# Altium PCB MB1814.PcbDoc (part 2 of 6)
Units mm, origin at the board's own origin, x right, y up, seen from the top; angles counter-clockwise.
Board outline 70 x 82.5 mm, 4 copper layers (Top Layer, Signal Layer 1, Signal Layer 2, Bottom Layer), stack 1.614 mm thick; 207 components, 155 nets, 901 pads, 710 vias.
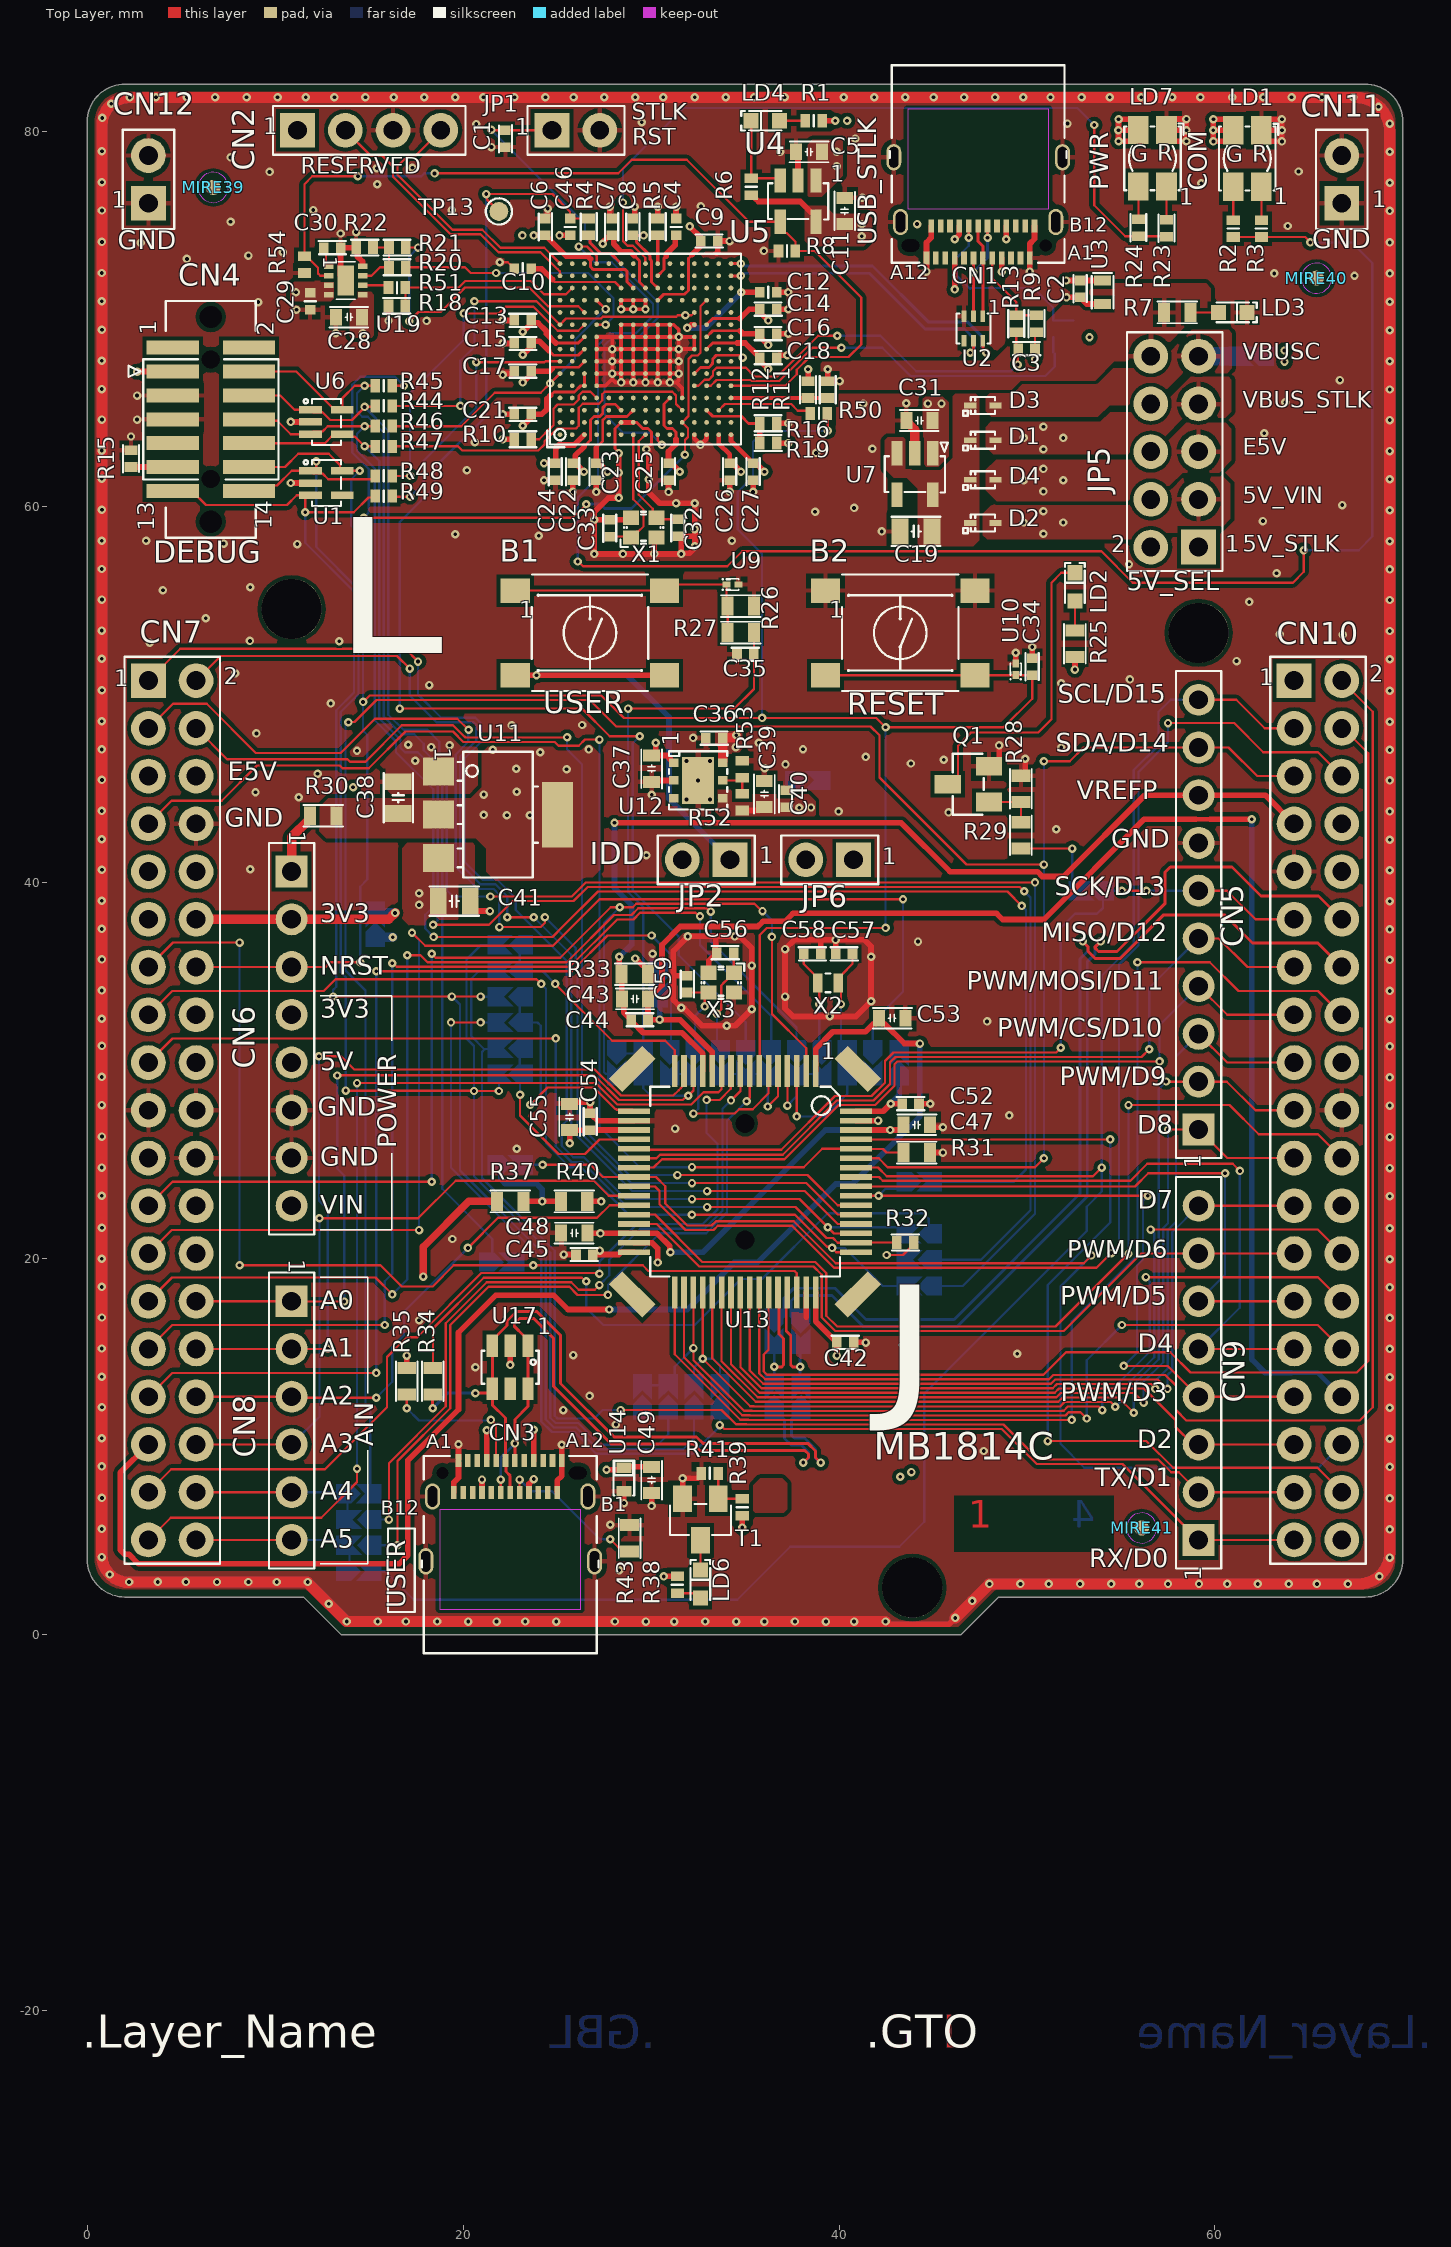
[diagram p0: Top Layer view]

## Part data (continued)
LD4: library part MCD-00587, "LED Red, 0603 SMD, 2V Forward Voltage", Alternate_Manufacturer="OSRAM OPTO SEMICONDUCTORS", Alternate_Manufacturer_Part_Number="LS Q976-NR-1", Manufacturer=VISHAY, Manufacturer_Part_Number=VLMS1300-GS08, Package="LED 0603", ComponentLink1Description=Datasheet, ComponentLink1URL=http://tunmcdsvn.tun.st.com/Component_Datasheet_Library/Trunk/Display/VISHAY_LED_RED_VLMS1300-GS08, ECCN_EU=n/a, ECCN_US=n/a, Internal_Part_Number=MCD-00587, Order_Code_Digikey=VLMS1300-GS08CT-ND, Order_Code_Farnell=2078728, Part_Type=Display, Provided_By=SUBCO, Status=Released
Q1: library part MCD-00073, "NPN Bipolar Transistor", Alternate_Manufacturer="ON SEMICONDUCTOR", Alternate_Manufacturer_Part_Number="MMBT2222LT1G / MMBT2222ALT1G / MMBT2222ALT3G", Manufacturer_Part_Number=BSR14, Package=SOT23, ComponentLink1Description=Datasheet, ComponentLink1URL=http://tunmcdsvn.tun.st.com/Component_Datasheet_Library/Trunk/IC/NXP_Transistor_BSR14, ECCN_EU=NEC, ECCN_US=EAR99, Internal_Part_Number=MCD-00073, Manufacturer="ON SEMICONDUCTOR", Part_Type=IC, Provided_By=SUBCO, Status=Released
R1: library part MCD-00061, "Resistor,1K,0402,1%,1/16W", Manufacturer=YAGEO, Manufacturer_Part_Number=RC0402FR-071KL, Package=R0402, ComponentLink1Description=Datasheet, ComponentLink1URL=http://tunmcdsvn.tun.st.com/Component_Datasheet_Library/Trunk/Resistors/Yageo_Resistor_RC0402-series, Initial_Board_Reference=MB1274, Internal_Part_Number=MCD-00061, Item Type=Item, Part_Type=Resistor, Path=ws/MCD_ApplicationBoards/Lists/MCDPARTSdatabase, Provided_By=SUBCO, Status=Released